# Altium PCB TransceiverPCB.PcbDoc
Units mil, origin at the board's own origin, x right, y up, seen from the top; angles counter-clockwise.
Board outline 1850.39 x 2204.72 mil, 2 copper layers (Top Layer, Bottom Layer); 15 components, 16 nets, 71 pads, 4 vias.
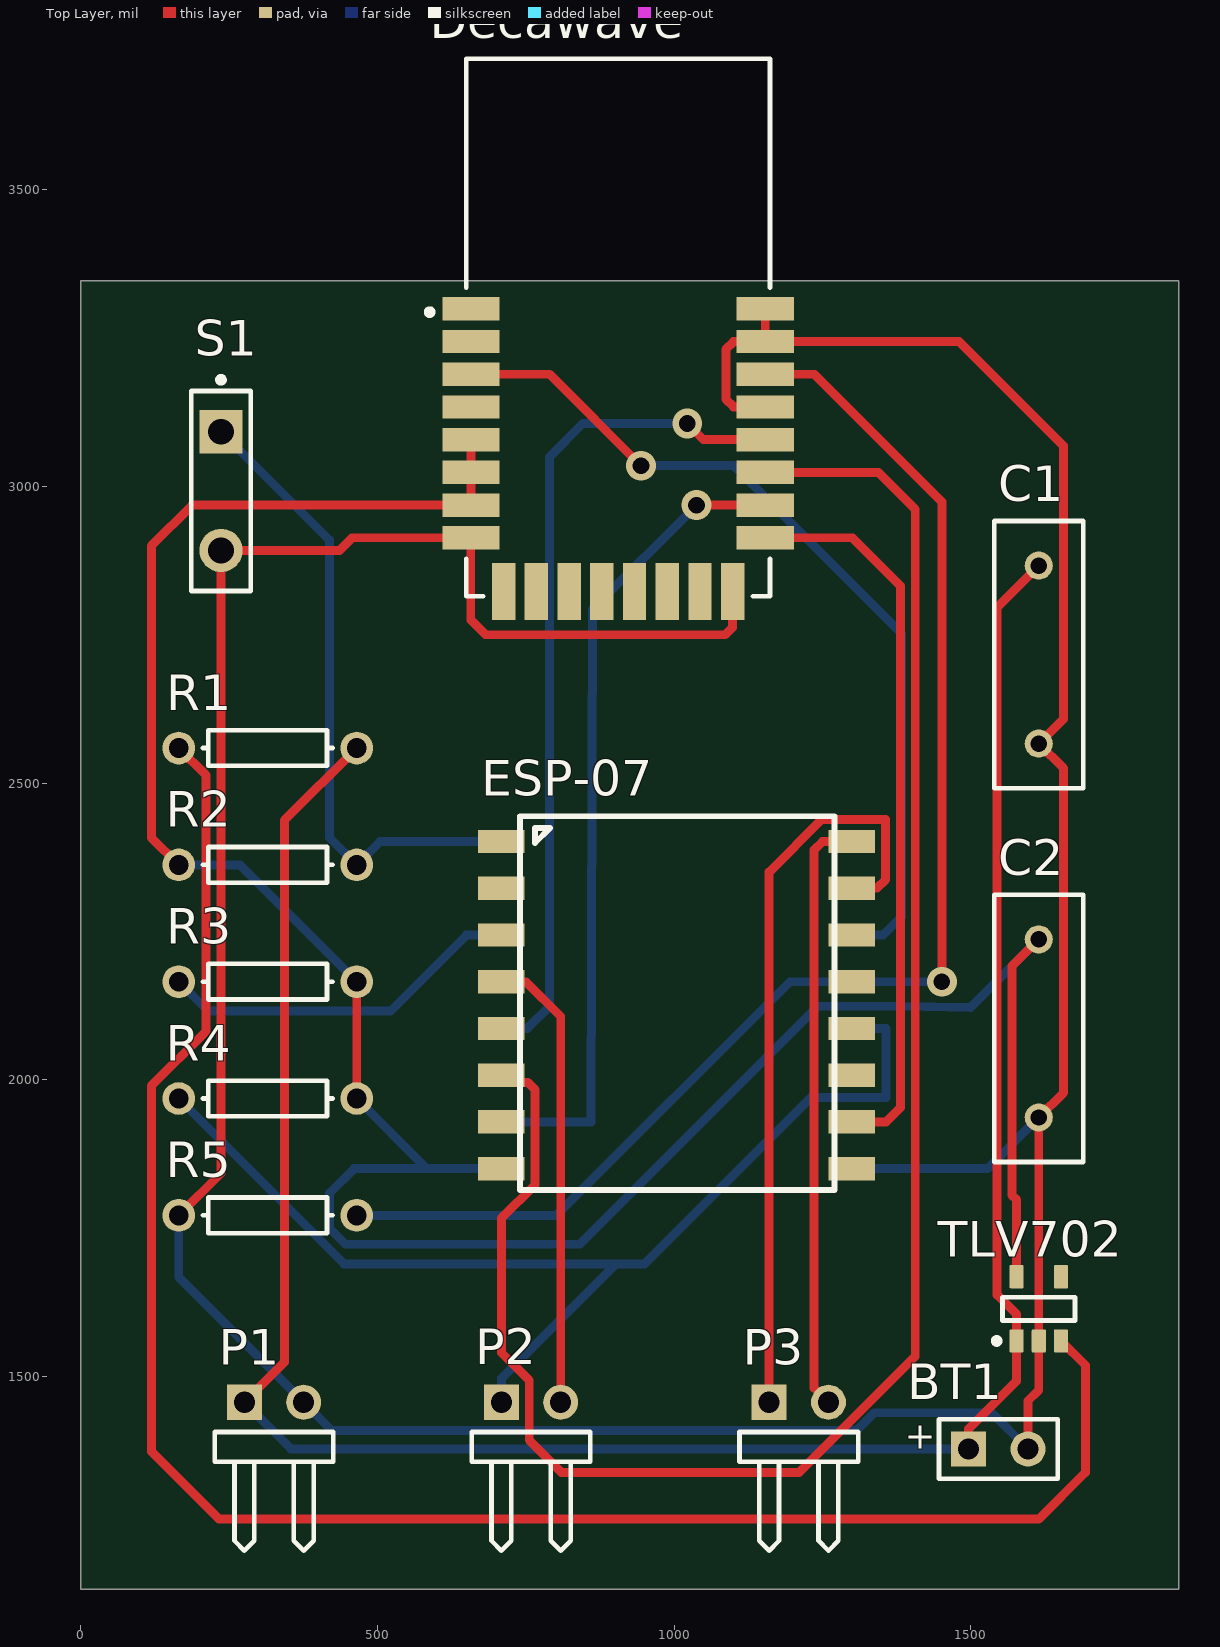
[diagram p0: Top Layer view]
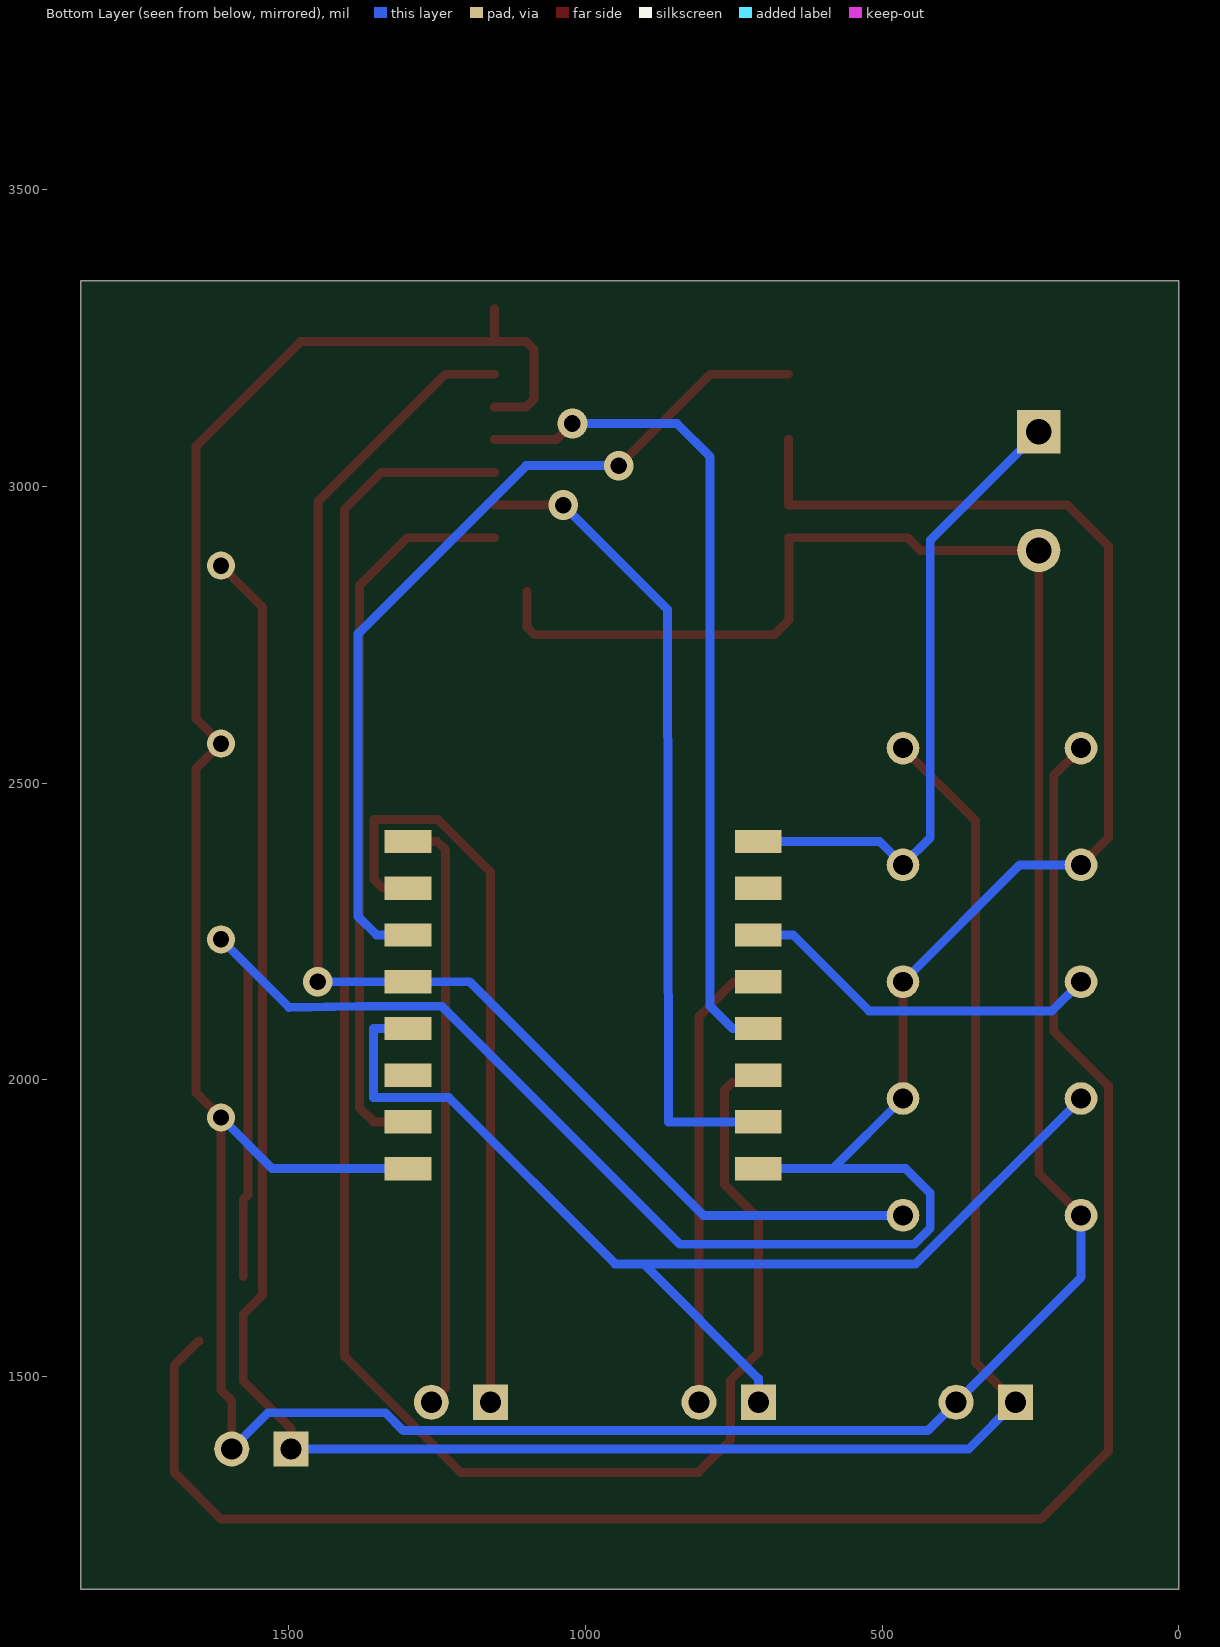
[diagram p1: Bottom Layer view, seen from below]

## Layer stack, top to bottom
Top Solder: solder mask 0.4, Solder Resist, Dk 3.5
Top Layer: signal copper 1.4
Dielectric 1: dielectric 12.6, FR-4, Dk 4.8
Bottom Layer: signal copper 1.4
Bottom Solder: solder mask 0.4, Solder Resist, Dk 3.5

## Board outline
0,3346.46 0,1141.73 1850.39,1141.73 1850.39,3346.46
cut-out: 2322.83,787.4

## Design rules (kind name [scope] priority, off if disabled: settings)
Clearance [All] p1: gap=10 ignorepadtopadclearanceinfootprint=FALSE except(0: Arc-Hole Track-Hole SMDPad-Hole THPad-Hole Via-Hole Fill-Hole Poly-Hole Region-Hole Text-Hole)
PolygonConnect [All] p1: connectstyle=Relief reliefconductorwidth=10 reliefentries=4 polygonreliefangle="90 Angle" airgapwidth=10
RoomDefinition TransceiverSheet [InComponentClass('TransceiverSheet')] p1: confinementstyle=ConfineIn formatcopy=TRUE lockcomponents=FALSE outline 0,0 2000,0 2000,1000 0,1000
RoutingVias [All] p1: holewidth=28 width=50 viastyle="Through Hole" minholewidth=28 minwidth=50 maxholewidth=28 maxwidth=50
SolderMaskExpansion [All] p1: expansion=4 istentingtop=FALSE
Width [All] p1: maxlimit=15 minlimit=15 preferedwidth=15
30 further rules are at their usual default settings.

## Components (designator, comment, footprint, x,y, rotation, side; value= is the part's Value field where it differs from the comment)
BT1 "Battery" BAT-2 1546.06,1377.95 r0 top
C1 "Cap" RAD-0.3 1614.17,2716.54 r90 top value=10uF
C2 "Cap" RAD-0.3 1614.17,2086.61 r90 top value=10uF
Decawave "DWM1000" DECW-DWM1000-24_V 905.51,3267.72 r0 top
ESP-07 "MC" ESP8266 708.66,2401.57 r270 top (schematic designator *)
P1 "Header 2H" HDR1X2H 275.59,1456.69 r0 top
P2 "Header 2H" HDR1X2H 708.66,1456.69 r0 top
P3 "Header 2H" HDR1X2H 1159.84,1456.69 r0 top
R1 "Res1" AXIAL-0.3 314.96,2559.06 r180 top value=10K
R2 "Res1" AXIAL-0.3 314.96,2362.2 r0 top value=1K
R3 "Res1" AXIAL-0.3 314.96,2165.35 r180 top value=1K
R4 "Res1" AXIAL-0.3 314.96,1968.5 r0 top value=1K
R5 "Res1" AXIAL-0.3 314.96,1771.65 r180 top value=10K
S1 "SW-SPST" SPST-2 236.22,2992.13 r270 top
TLV702 "TLV70233DBVR" DBV0005A_N 1614.17,1614.17 r90 top

## Footprints (in the part's own frame and the unit in brackets; to place one, negate y for a bottom-side part, rotate by r counter-clockwise, add the part's x,y. Pads: shape width x height; smd on the part's side, far side on the other; paste and mask are expansions set on the pad)
AXIAL-0.3 [mm] "Axial Device, Thru-Hole; 2 Leads; 0.3 in Pin Spacing"
  round 1.4 hole 0.85: 1(-3.81,0) 2(3.81,0)
  silkscreen extent -2.77,-0.76 2.77,0.76
BAT-2 [mm] "Battery; 2 Leads"
  rect 1.5x1.5 hole 0.9: 1(-1.27,0)
  round 1.5 hole 0.9: 2(1.27,0)
  silkscreen extent -2.54,-1.27 2.54,1.27
DBV0005A_N [mm] "SOT23, 5-Leads, Body 3.05x1.75mm, Pitch 0.95mm, IPC Medium Density"
  rrect17% 1x0.6 smd: 1(-1.375,0.95) 2(-1.375,0) 3(-1.375,-0.95) 4(1.375,-0.95) 5(1.375,0.95)
  silkscreen extent -1.5,-1.55 0.5,1.92, body extent -1.42,-1.46 1.42,1.46, height 1.08
DECW-DWM1000-24_V [mm] "SMD, 24-Leads, Body 23x13mm, Pitch 1.4mm"
  rect 2.45x1 smd: 1(-6.295,0.8) 2(-6.295,-0.6) 3(-6.295,-2) 4(-6.295,-3.4) 5(-6.295,-4.8) 6(-6.295,-6.2) 7(-6.295,-7.6) 8(-6.295,-9) 17(6.295,-9) 18(6.295,-7.6) 19(6.295,-6.2) 20(6.295,-4.8) 21(6.295,-3.4) 22(6.295,-2) 23(6.295,-0.6) 24(6.295,0.8)
  rect 1x2.45 smd: 9(-4.9,-11.295) 10(-3.5,-11.295) 11(-2.1,-11.295) 12(-0.7,-11.295) 13(0.7,-11.295) 14(2.1,-11.295) 15(3.5,-11.295) 16(4.9,-11.295)
  silkscreen extent -8.19,-11.5 6.5,11.5, body extent -6.5,-11.5 6.5,11.5, height 4
ESP8266 [mm] "ESP-07"
  rect 1x2 all layers, no hole: 1(0,0) 2(2,0) 3(4,0) 4(6,0) 5(8,0) 6(10,0) 7(12,0) 8(14,0) 8(14,0) 9(14,15) 9(14,15) 10(12,15) 11(10,15) 12(8,15) 13(6,15) 14(4,15) 15(2,15) 16(0,15)
  silkscreen extent -1.08,0.8 14.92,14.27
HDR1X2H [mm] "Connector; Header; 2 Position; Right Angle"
  rect 1.5x1.5 hole 0.9: 1(0,0)
  round 1.5 hole 0.9: 2(2.54,0)
  silkscreen extent -1.27,-6.35 3.81,-1.27
RAD-0.3 [mm] "Radial Cap, Thru-Hole; 2 Leads; 0.3 in Pin Spacing"
  round 1.2 hole 0.7: 1(-3.81,0) 2(3.81,0)
  silkscreen extent -5.71,-1.91 5.72,1.9
SPST-2 [mm] "Switch; 2 Leads"
  rect 1.85x1.85 hole 1.1: 1(-2.54,0)
  round 1.85 hole 1.1: 2(2.54,0)
  silkscreen extent -4.89,-1.27 4.28,1.27

## Part data
BT1: "Multicell Battery", LatestRevisionDate=17-Jul-2002, LatestRevisionNote="Re-released for DXP Platform.", PackageDescription="Battery; 2 Leads", PackageReference=BAT-2, Published=24-Mar-1999, Publisher="Altium Limited"
C1 C2: "Capacitor", LatestRevisionDate=17-Jul-2002, LatestRevisionNote="Re-released for DXP Platform.", PackageDescription="Radial Cap, Thru-Hole; 2 Leads; 0.3 in Pin Spacing", PackageReference=RAD-0.3, Published=8-Jun-2000, Publisher="Altium Limited"
Decawave: library part CMP-2000-05094-1, "DW M1000 IEEE 802.15.4 -2011 UWB Transceiver Module", Current - Receiving=64mA, Current - Transmitting=31mA, Frequency=3.5GHz~6.5GHz, Manufacturer=Decawave, Operating Temperature=-40degC~85degC, Package / Case=Module, Power - Output=-, Standard Package=500, Voltage - Supply=2.8V~3.6V, Antenna Type=Integrated,Chip, Category=RF/IFandRFID, Data Rate=6.8Mbps, Datasheet URL=http://www.decawave.com/sites/default/files/resources/dwm1000-datasheet-v1.3.pdf, Datasheet Version="Rev. V1.0, 12/2015", Design Resources=DevelopmentToolSelector, Family=RFTransceiverModules, Featured Product=ScenSorDWM1000Module, Manufacturer URL=http://www.decawave.com/, Memory Size=-, Modulation=BPM,BPSK, Mounting Type=SurfaceMount, Online Catalog=ScenSorDWM1000Module, Other Names=1479-1002-2RUPF-G001A, Packaging=Tape&Reel(TR), Protocol=IR-UWB, RF Family/Standard=802.15.4, Sensitivity=-, Serial Interfaces=SPI, Series=-
P1 P2 P3: "Header, 2-Pin, Right Angle", LatestRevisionDate=17-Jul-2002, LatestRevisionNote="Re-released for DXP Platform.", Publisher="Altium Limited"
R1 R2 R3 R4 R5: "Resistor", LatestRevisionDate=17-Jul-2002, LatestRevisionNote="Re-released for DXP Platform.", PackageDescription="Axial Device, Thru-Hole; 2 Leads; 0.3 in Pin Spacing", PackageReference=AXIAL-0.3, Published=8-Jun-2000, Publisher="Altium Limited"
S1: "Single-Pole, Single-Throw Switch", LatestRevisionDate=17-Jul-2002, LatestRevisionNote="Re-released for DXP Platform.", PackageDescription="Switch; 2 Leads", PackageReference=SPST-2, Published=24-Mar-1999, Publisher="Altium Limited"
TLV702: library part CMP-0394-00528-2, "Single Output LDO, 300 mA, Fixed 3.3 V Output, 2 to 5.5 V Input, with Low IQ, 5-pin SOT-23 (DBV), -40 to 125 degC, Green (RoHS & no Sb/Br)", Manufacturer="Texas Instruments", Accuracy(%)=2, Code_JEDEC=MO-178, ComponentLink1Description="Manufacturer URL", ComponentLink1URL=http://www.ti.com/, ComponentLink2Description=Datasheet, ComponentLink2URL=http://www.ti.com/general/docs/lit/getliterature.tsp?genericPartNumber=TLV70233&fileType=pdf, ComponentLink3Description="Package Specification", ComponentLink3URL=http://www.ti.com/litv/pdf/mpds018i, DatasheetVersion=SLVSAG6B, Eco-Plan="Green (RoHS & no Sb/Br)", Fixed Output Options(V)=3.3, Iout(Max)(A)=0.3, Iq(Typ)(mA)=0.03, Mounting Technology="Surface Mount", PackageDescription="5-Pin Plastic Small Outline, Body 1.60 Ãƒâ€” 2.90 mm, Pitch 0.95 mm", PackageReference=DBV0005A, PackageVersion=4073253-4/K, PartNumber=TLV70233DBVR, SubFamily="Single Channel LDO", Vdo(Typ)(mV)=220, Vin(Max)(V)=5.5, Vin(Min)(V)=2, Vout Adj(Max)(V)=3.3, Vout Adj(Min)(V)=3.3

## Via types
v1: diameter 50, hole 28, Top Layer to Bottom Layer, 4 vias

## Nets (pads, with @x,y where several pads share a name; then routed paths per layer and width w, separated by ;. In a path a pad name is that pad's centre, name@x,y a point inside that pad or via, vN(x,y) a via of type N, cw(c..) or ccw(c..) an arc to the next point about the centre after c; other vN are vias at no path point)
GND: BT1.2 C1.1 C2.1 Decawave.8 Decawave.16 Decawave.21 Decawave.23 Decawave.24 ESP-07.9 P1.2 R5.2 S1.2 TLV702.2 | length 6874.9
  Top Layer w15: R5.2 236.22,1842.91 S1.2 436,2892.13 457.26,2913.39 Decawave.8@657,2913.39 ; Decawave.8 Decawave.8@657,2913.39 ; Decawave.16 1098.42,2762.5 1085.92,2750 682,2750 657,2775 Decawave.8@657,2913.39 ; Decawave.21 1100,3133.86 1087,3146.86 1087,3231.09 1100,3244.09 Decawave.23 ; Decawave.24 Decawave.23 ; BT1.2 1596.06,1459 1614.17,1477.11 TLV702.2 C2.1 1656,1978.44 1656,2524.71 C1.1 1656,2608.36 1656,3068 1479.91,3244.09 Decawave.23
  Bottom Layer w15: R5.2 164.96,1667.32 P1.2 423.28,1409 1307,1409 1337,1439 1535.02,1439 BT1.2 ; ESP-07.9@1299.21,1850.39 1527.95,1850.39 C2.1
IRQ: Decawave.22 ESP-07.13 R5.1 | length 2344.4
  Top Layer w15: Decawave.22 1236,3188.98 1451,2973.98 v1(1451,2165.35)
  Bottom Layer w15: R5.1 801.33,1771.65 1195.03,2165.35 ESP-07.13 v1(1451,2165.35)
JMP1: ESP-07.12 P2.1 R4.1 | length 1911.2
  Bottom Layer w15: R4.1 443.46,1690 902,1690 ; P2.1 708.66,1496.66 902,1690 ; ESP-07.12 1357,2086.61 1357,1970 1230,1970 950,1690 902,1690
JMP2: ESP-07.4 P2.2 | length 774.3
  Top Layer w15: ESP-07.4 750,2165.35 808.66,2106.69 P2.2
Net*_1: ESP-07.1 R2.2 S1.1 | length 1084.7
  Bottom Layer w15: S1.1 419,2909.35 419,2408.17 R2.2 504.33,2401.57 ESP-07.1
Net*_3: ESP-07.3 R3.2 | length 617.2
  Bottom Layer w15: R3.2 214.31,2116 522,2116 650.09,2244.09 ESP-07.3
NetR1_2: R1.2 TLV702.3 | length 3134.6
  Top Layer w15: R1.2 211,2513.02 211,2082 119,1990 119,1374 233.16,1259.84 1614.17,1259.84 1692.91,1338.58 1692.91,1518.7 TLV702.3
RESET: Decawave.3 ESP-07.14 | length 1479.9
  Top Layer w15: Decawave.3 790,3188.98 v1(943.98,3035)
  Bottom Layer w15: v1(943.98,3035) 1100,3035 1383,2752 1383,2275 1352.09,2244.09 ESP-07.14
RX: ESP-07.15 P3.1 | length 1290.5
  Top Layer w15: P3.1 1159.84,2350 1248.6,2438.76 1356.08,2438.76 1356.08,2337.5 1341.42,2322.83 ESP-07.15
SPICLK: Decawave.20 ESP-07.5 | length 1420.7
  Top Layer w15: v1(1022,3106) 1049.26,3078.74 Decawave.20
  Bottom Layer w15: ESP-07.5 752.61,2086.61 790,2124 790,3050 846,3106 v1(1022,3106)
SPICS: Decawave.17 ESP-07.10 | length 1232.3
  Top Layer w15: Decawave.17 1300,2913.39 1381.08,2832.3 1381.08,1953.22 1357,1929.13 ESP-07.10
SPIMISO: Decawave.19 ESP-07.6 | length 3160.2
  Top Layer w15: ESP-07.6 720.85,1995.69 752.85,1995.69 765.53,1983 765.53,1823.46 708.66,1766.59 708.66,1540.5 755.69,1493.47 755.69,1392.68 809.79,1338.58 1210.58,1338.58 1406.08,1534.08 1406.08,2961.54 1344,3023.62 Decawave.19
SPIMOSI: Decawave.18 ESP-07.7 | length 1379.2
  Top Layer w15: v1(1037.5,2968.5) Decawave.18
  Bottom Layer w15: ESP-07.7 860,1929.13 862,2793 v1(1037.5,2968.5)
TX: ESP-07.16 P3.2 | length 1010.1
  Top Layer w15: P3.2 1235.76,1480.77 1235.76,2387.5 1249.84,2401.57 ESP-07.16
VCC: C2.2 Decawave.5 Decawave.6 Decawave.7 ESP-07.8 R2.1 R3.1 R4.2 TLV702.5 | length 4355.5
  Top Layer w15: R2.1 119,2408.17 119,2900 187.5,2968.5 Decawave.7 Decawave.6 Decawave.5 ; R4.2 R3.1 ; TLV702.5 1576.77,1798 1569,1805.77 1569,2191.44 C2.2
  Bottom Layer w15: R2.1 268.11,2362.2 R3.1 ; R4.2 583.07,1850.39 ; ESP-07.8@708.66,1850.39 583.07,1850.39 ; C2.2 1499.56,2122 1383,2124 1242,2124 841,1723 446,1723 419,1750 419,1809 460.39,1850.39 583.07,1850.39
Vin: BT1.1 C1.2 P1.1 R1.1 TLV702.1 | length 3998.6
  Top Layer w15: P1.1 343,1524.1 343,2437.09 R1.1 ; BT1.1 1496.06,1412 1576.77,1492.71 TLV702.1 1576.77,1605 1544,1637.77 1544,2796.36 C1.2
  Bottom Layer w15: P1.1 354.33,1377.95 BT1.1
pads on no net: Decawave.1 Decawave.2 Decawave.4 Decawave.9 Decawave.10 Decawave.11 Decawave.12 Decawave.13 Decawave.14 Decawave.15 ESP-07.2 ESP-07.11 TLV702.4

## Text inside footprints (layer, text, board x,y; h text height)
BT1: Top Overlay "+" at 1388.58,1377.95 h45.28